# Altium PCB JadePlus_v0.3.1_board.PcbDoc (part 1 of 3)
Units mm, origin at the board's own origin, x right, y up, seen from the top; angles counter-clockwise.
Board outline 26 x 60.7 mm, 4 copper layers (Top/Sig1, Layer 1, Layer 2, Bottom Layer), stack 0.975 mm thick; 120 components, 82 nets, 471 pads, 1359 vias.
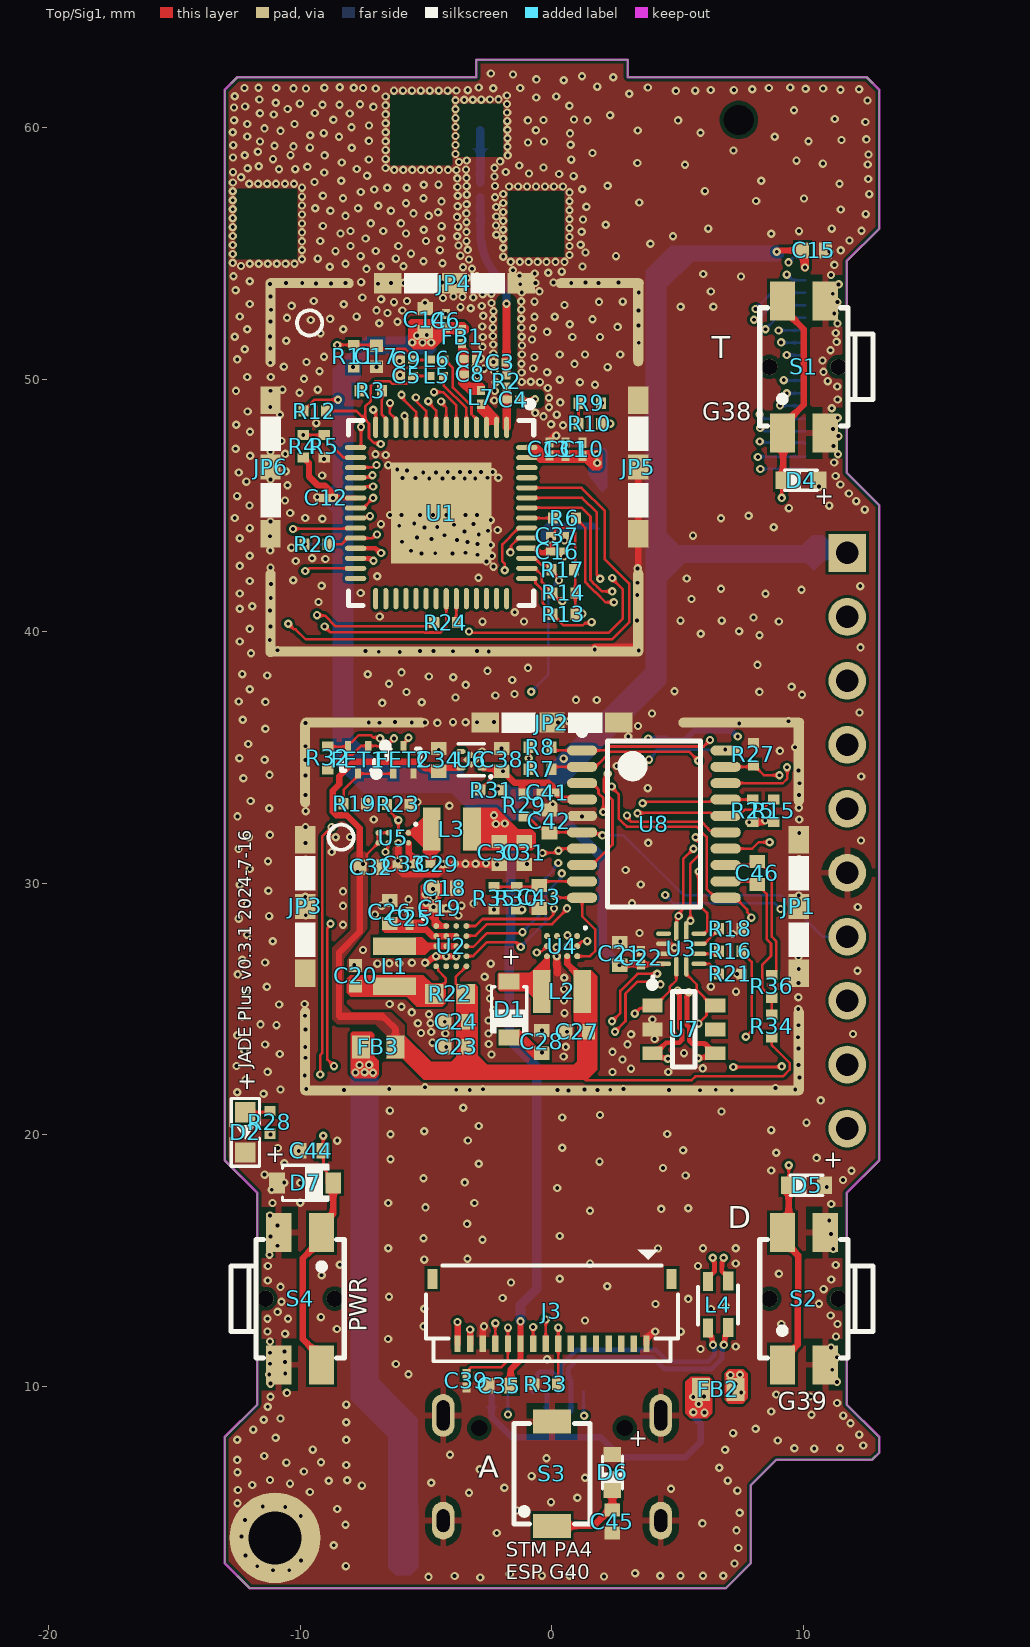
[diagram p0: Top/Sig1 view]
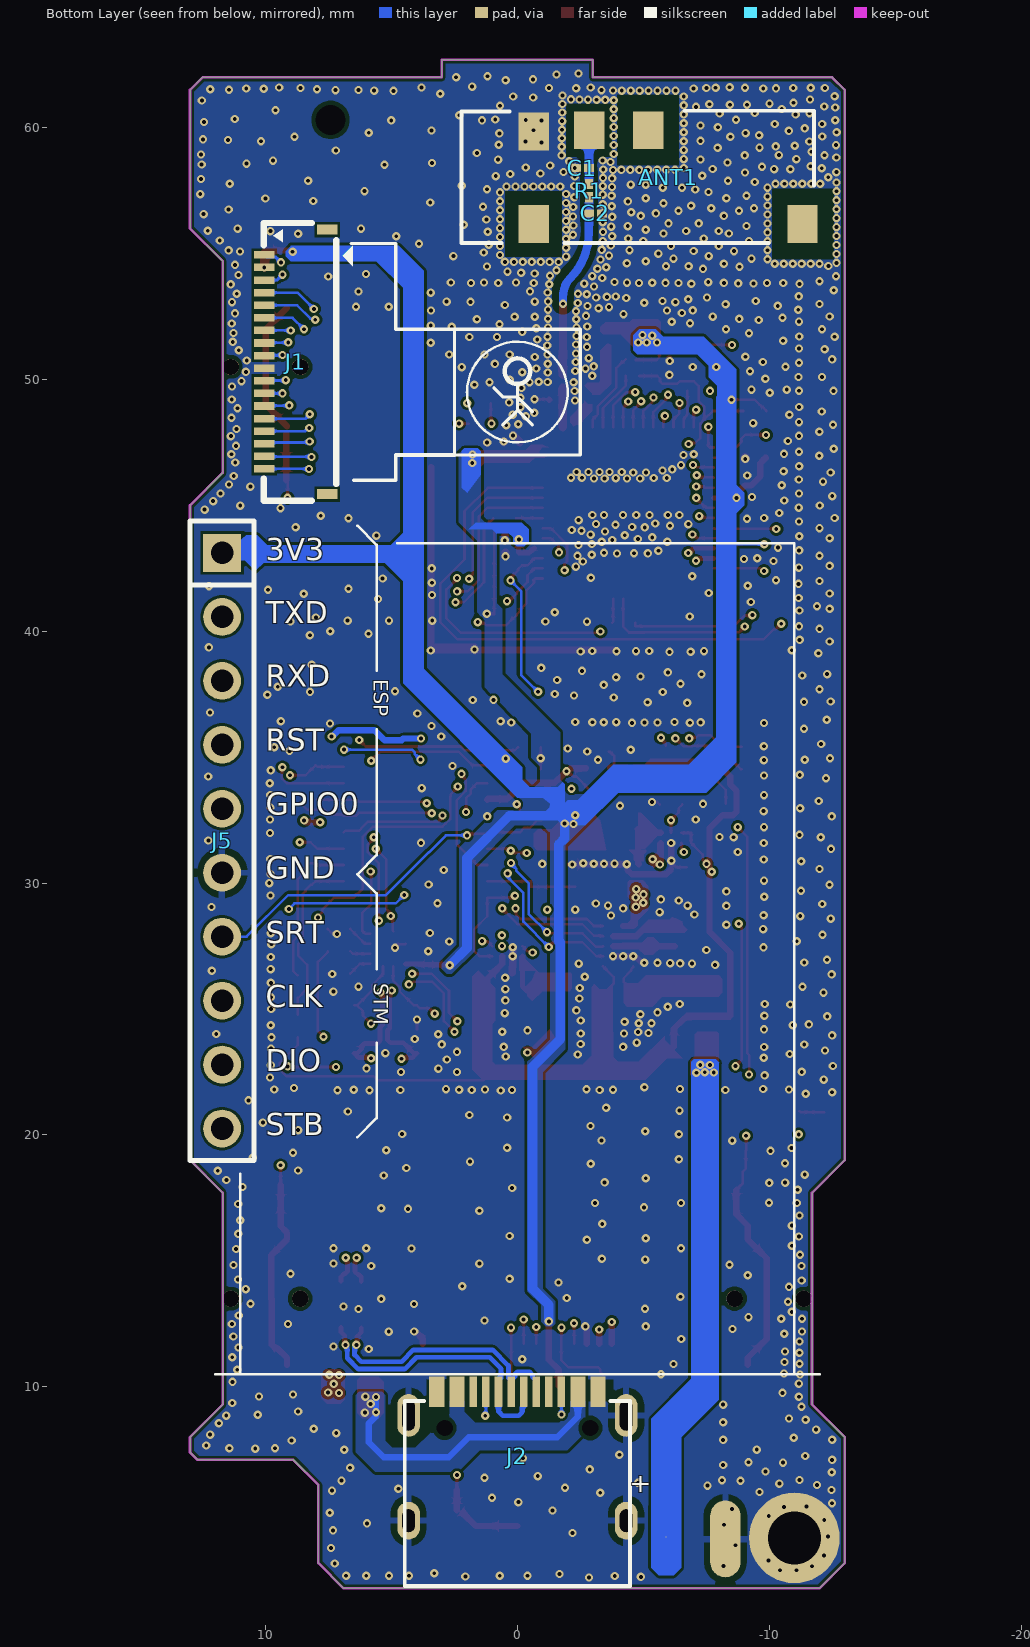
[diagram p1: Bottom Layer view, seen from below]
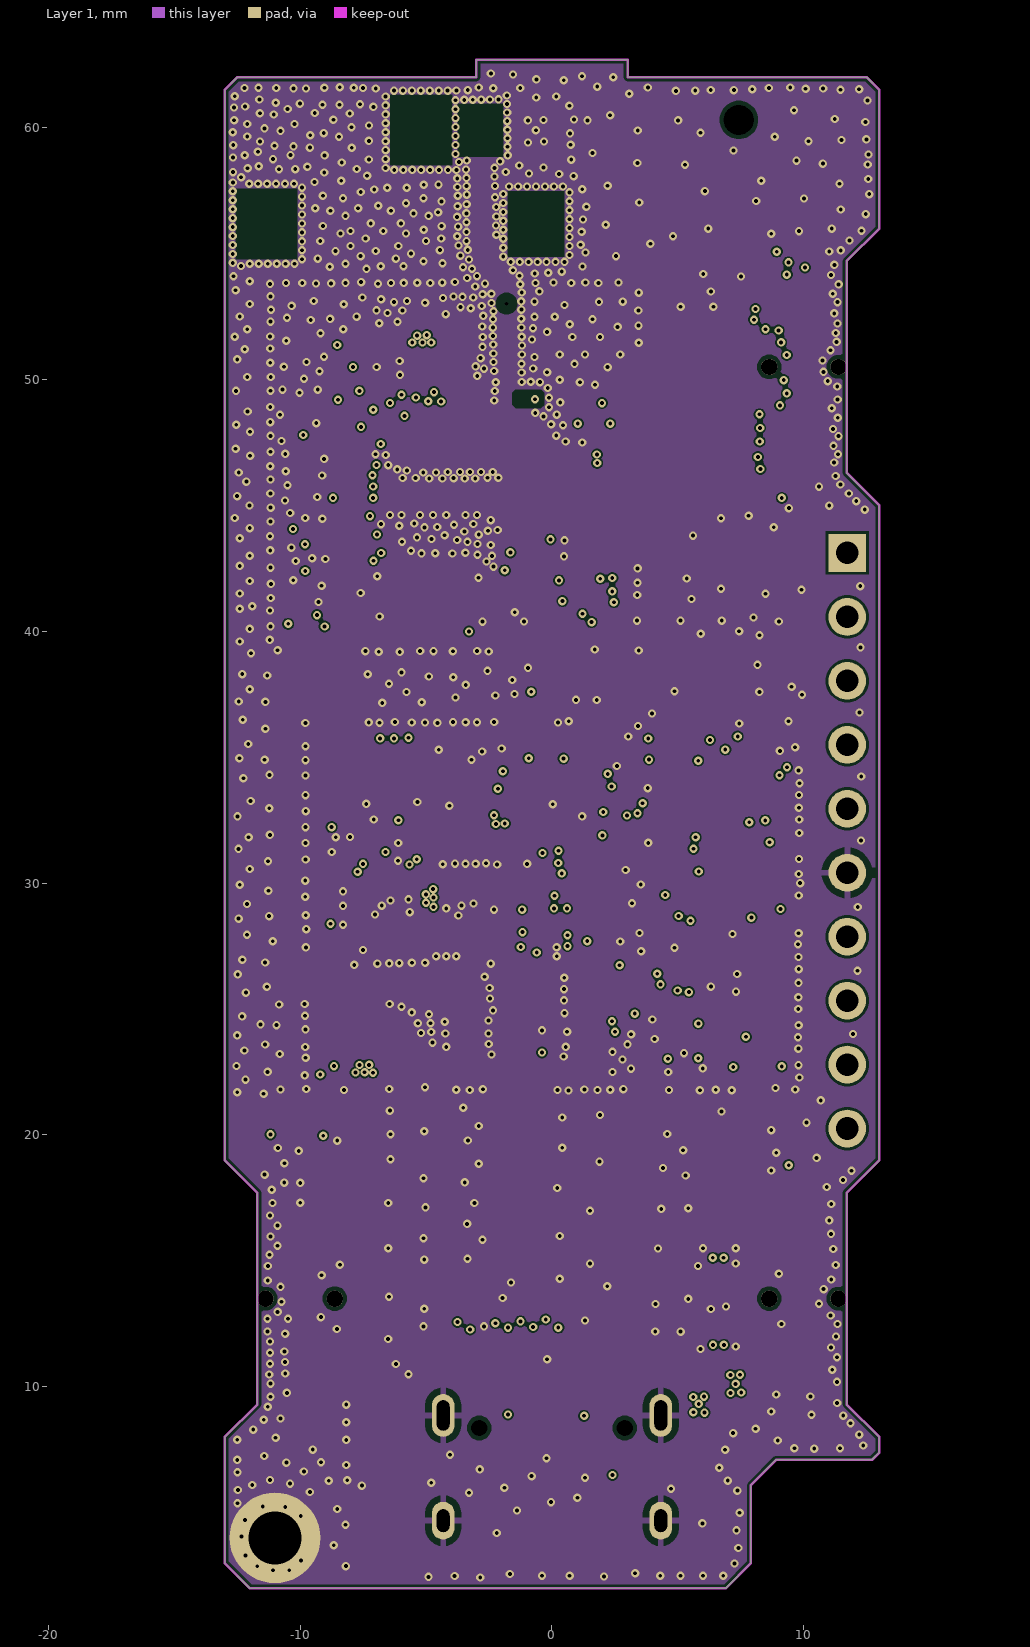
[diagram p2: Layer 1]
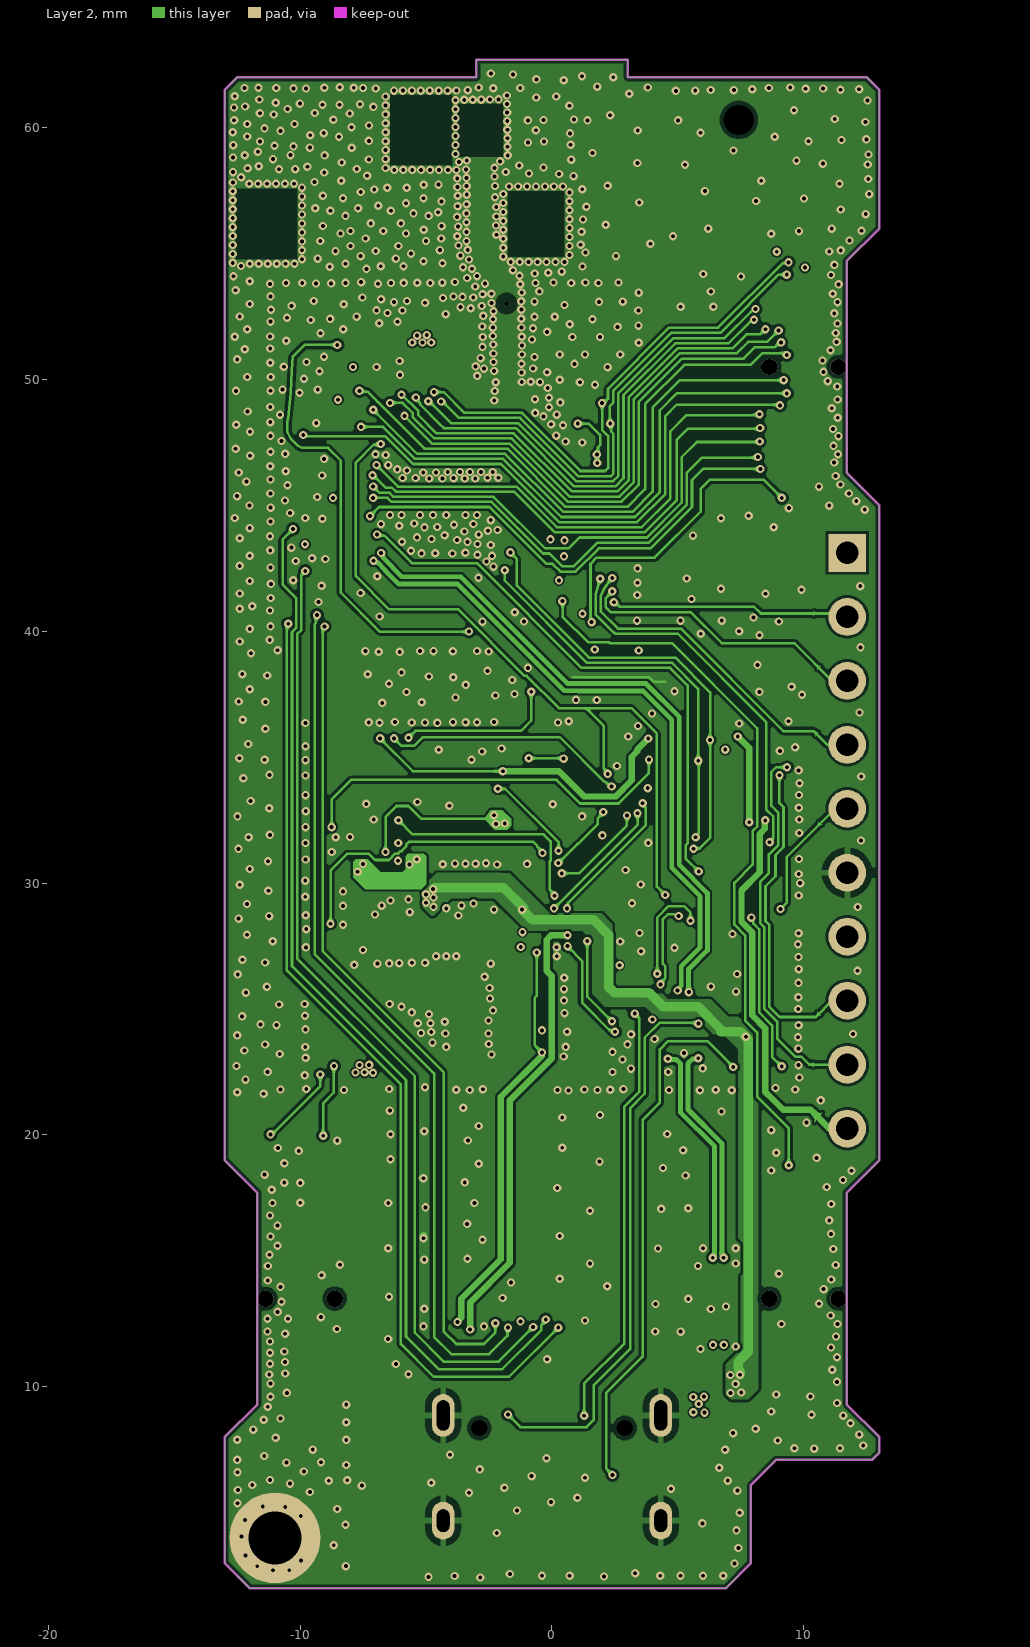
[diagram p3: Layer 2]

## Layer stack, top to bottom
Top Solder: solder mask 0.0127, Solder Resist, Dk 3.8
Top/Sig1: signal copper 0.035
Dielectric 1: prepreg 0.2, PP-006, Dk 4.1
Layer 1: signal copper 0.0175
Dielectric 2: core 0.4696, Core-009, Dk 4.5
Layer 2: signal copper 0.0175
Dielectric 3: prepreg 0.2, PP-006, Dk 4.1
Bottom Layer: signal copper 0.035
Board Layer Stack Bottom Solder: solder mask 0.0127, Solder Resist, Dk 3.8

## Board outline
-13,3 -12,2 6.9,2 7.9,3 7.9,6.1 8.9,7.1 12.7,7.1 13,7.4 13,8 11.7,9.3 11.7,17.7 13,19 13,45 11.7,46.3 11.7,54.7 13,56 13,61.5 12.5,62 3,62 3,62.7 -3,62.7 -3,62 -12.5,62 -13,61.5 -13,19 -11.7,17.7 -11.7,9.3 -13,8

## Design rules (kind name [scope] priority, off if disabled: settings)
Clearance [All] p1: gap=0.102 ignorepadtopadclearanceinfootprint=FALSE except(0.152: Arc-Hole Track-Hole Fill-Hole Poly-Hole Region-Hole)
DiffPairsRouting [All] p1: maxlimit=0.102 minlimit=0.102 mostfreqgap=0.102 substack1={92988ACF-1938-4EE3-B9A0-211830619E81} toplayer_{92988acf-1938-4ee3-b9a0-211830619e81}_minwidth=0.381 toplayer_{92988acf-1938-4ee3-b9a0-211830619e81}_maxwidth=0.381 toplayer_{92988acf-1938-4ee3-b9a0-211830619e81}_prefwidth=0.381 midlayer1_{92988acf-1938-4ee3-b9a0-211830619e81}_minwidth=0.381 midlayer1_{92988acf-1938-4ee3-b9a0-211830619e81}_maxwidth=0.381 midlayer1_{92988acf-1938-4ee3-b9a0-211830619e81}_prefwidth=0.381 midlayer2_{92988acf-1938-4ee3-b9a0-211830619e81}_minwidth=0.381 midlayer2_{92988acf-1938-4ee3-b9a0-211830619e81}_maxwidth=0.381 midlayer2_{92988acf-1938-4ee3-b9a0-211830619e81}_prefwidth=0.381 bottomlayer_{92988acf-1938-4ee3-b9a0-211830619e81}_minwidth=0.381 bottomlayer_{92988acf-1938-4ee3-b9a0-211830619e81}_maxwidth=0.381 bottomlayer_{92988acf-1938-4ee3-b9a0-211830619e81}_prefwidth=0.381 substack2={F6148FA0-9CFD-4FD5-9EC7-82D683A142CA} toplayer_{f6148fa0-9cfd-4fd5-9ec7-82d683a142ca}_minwidth=0.381 toplayer_{f6148fa0-9cfd-4fd5-9ec7-82d683a142ca}_maxwidth=0.381 toplayer_{f6148fa0-9cfd-4fd5-9ec7-82d683a142ca}_prefwidth=0.381 midlayer1_{f6148fa0-9cfd-4fd5-9ec7-82d683a142ca}_minwidth=0.381 midlayer1_{f6148fa0-9cfd-4fd5-9ec7-82d683a142ca}_maxwidth=0.381 midlayer1_{f6148fa0-9cfd-4fd5-9ec7-82d683a142ca}_prefwidth=0.381 midlayer2_{f6148fa0-9cfd-4fd5-9ec7-82d683a142ca}_minwidth=0.381 midlayer2_{f6148fa0-9cfd-4fd5-9ec7-82d683a142ca}_maxwidth=0.381 midlayer2_{f6148fa0-9cfd-4fd5-9ec7-82d683a142ca}_prefwidth=0.381 bottomlayer_{f6148fa0-9cfd-4fd5-9ec7-82d683a142ca}_minwidth=0.381 bottomlayer_{f6148fa0-9cfd-4fd5-9ec7-82d683a142ca}_maxwidth=0.381 bottomlayer_{f6148fa0-9cfd-4fd5-9ec7-82d683a142ca}_prefwidth=0.381 substack3={8B595D62-CE37-4B08-ADE8-BEBB8B08FA51} toplayer_{8b595d62-ce37-4b08-ade8-bebb8b08fa51}_minwidth=0.381 toplayer_{8b595d62-ce37-4b08-ade8-bebb8b08fa51}_maxwidth=0.381 toplayer_{8b595d62-ce37-4b08-ade8-bebb8b08fa51}_prefwidth=0.381 midlayer1_{8b595d62-ce37-4b08-ade8-bebb8b08fa51}_minwidth=0.381 midlayer1_{8b595d62-ce37-4b08-ade8-bebb8b08fa51}_maxwidth=0.381 midlayer1_{8b595d62-ce37-4b08-ade8-bebb8b08fa51}_prefwidth=0.381 midlayer2_{8b595d62-ce37-4b08-ade8-bebb8b08fa51}_minwidth=0.381 midlayer2_{8b595d62-ce37-4b08-ade8-bebb8b08fa51}_maxwidth=0.381 midlayer2_{8b595d62-ce37-4b08-ade8-bebb8b08fa51}_prefwidth=0.381 bottomlayer_{8b595d62-ce37-4b08-ade8-bebb8b08fa51}_minwidth=0.381 bottomlayer_{8b595d62-ce37-4b08-ade8-bebb8b08fa51}_maxwidth=0.381 bottomlayer_{8b595d62-ce37-4b08-ade8-bebb8b08fa51}_prefwidth=0.381 substack4={5A0EA1D2-40C4-4962-BB78-5EF899C24081} toplayer_{5a0ea1d2-40c4-4962-bb78-5ef899c24081}_minwidth=0.381 toplayer_{5a0ea1d2-40c4-4962-bb78-5ef899c24081}_maxwidth=0.381 toplayer_{5a0ea1d2-40c4-4962-bb78-5ef899c24081}_prefwidth=0.381 midlayer1_{5a0ea1d2-40c4-4962-bb78-5ef899c24081}_minwidth=0.381 midlayer1_{5a0ea1d2-40c4-4962-bb78-5ef899c24081}_maxwidth=0.381 midlayer1_{5a0ea1d2-40c4-4962-bb78-5ef899c24081}_prefwidth=0.381 midlayer2_{5a0ea1d2-40c4-4962-bb78-5ef899c24081}_minwidth=0.381 midlayer2_{5a0ea1d2-40c4-4962-bb78-5ef899c24081}_maxwidth=0.381 midlayer2_{5a0ea1d2-40c4-4962-bb78-5ef899c24081}_prefwidth=0.381 bottomlayer_{5a0ea1d2-40c4-4962-bb78-5ef899c24081}_minwidth=0.381 bottomlayer_{5a0ea1d2-40c4-4962-bb78-5ef899c24081}_maxwidth=0.381 bottomlayer_{5a0ea1d2-40c4-4962-bb78-5ef899c24081}_prefwidth=0.381 toplayer_minwidth=0.191 toplayer_maxwidth=0.191 toplayer_prefwidth=0.191 midlayer1_minwidth=0.191 midlayer1_maxwidth=0.191 midlayer1_prefwidth=0.191 midlayer2_minwidth=0.191 midlayer2_maxwidth=0.191 midlayer2_prefwidth=0.191 bottomlayer_minwidth=0.191 bottomlayer_maxwidth=0.191 bottomlayer_prefwidth=0.191 substack5={0CFC8957-5C50-4263-9851-7E474541E8D7} toplayer_{0cfc8957-5c50-4263-9851-7e474541e8d7}_minwidth=0.381 toplayer_{0cfc8957-5c50-4263-9851-7e474541e8d7}_maxwidth=0.381 toplayer_{0cfc8957-5c50-4263-9851-7e474541e8d7}_prefwidth=0.381 midlayer1_{0cfc8957-5c50-4263-9851-7e474541e8d7}_minwidth=0.381 midlayer1_{0cfc8957-5c50-4263-9851-7e474541e8d7}_maxwidth=0.381 midlayer1_{0cfc8957-5c50-4263-9851-7e474541e8d7}_prefwidth=0.381 midlayer2_{0cfc8957-5c50-4263-9851-7e474541e8d7}_minwidth=0.381 midlayer2_{0cfc8957-5c50-4263-9851-7e474541e8d7}_maxwidth=0.381 midlayer2_{0cfc8957-5c50-4263-9851-7e474541e8d7}_prefwidth=0.381 bottomlayer_{0cfc8957-5c50-4263-9851-7e474541e8d7}_minwidth=0.381 bottomlayer_{0cfc8957-5c50-4263-9851-7e474541e8d7}_maxwidth=0.381 bottomlayer_{0cfc8957-5c50-4263-9851-7e474541e8d7}_prefwidth=0.381 substack6={891EAD28-3441-4CE9-9ED8-1EA925882EB5} toplayer_{891ead28-3441-4ce9-9ed8-1ea925882eb5}_minwidth=0.381 toplayer_{891ead28-3441-4ce9-9ed8-1ea925882eb5}_maxwidth=0.381 toplayer_{891ead28-3441-4ce9-9ed8-1ea925882eb5}_prefwidth=0.381 midlayer1_{891ead28-3441-4ce9-9ed8-1ea925882eb5}_minwidth=0.381 midlayer1_{891ead28-3441-4ce9-9ed8-1ea925882eb5}_maxwidth=0.381 midlayer1_{891ead28-3441-4ce9-9ed8-1ea925882eb5}_prefwidth=0.381 midlayer2_{891ead28-3441-4ce9-9ed8-1ea925882eb5}_minwidth=0.381 midlayer2_{891ead28-3441-4ce9-9ed8-1ea925882eb5}_maxwidth=0.381 midlayer2_{891ead28-3441-4ce9-9ed8-1ea925882eb5}_prefwidth=0.381 bottomlayer_{891ead28-3441-4ce9-9ed8-1ea925882eb5}_minwidth=0.381 bottomlayer_{891ead28-3441-4ce9-9ed8-1ea925882eb5}_maxwidth=0.381 bottomlayer_{891ead28-3441-4ce9-9ed8-1ea925882eb5}_prefwidth=0.381 substack7={7F79224F-7092-4D3B-9988-48B015572600} toplayer_{7f79224f-7092-4d3b-9988-48b015572600}_minwidth=0.381 toplayer_{7f79224f-7092-4d3b-9988-48b015572600}_maxwidth=0.381 toplayer_{7f79224f-7092-4d3b-9988-48b015572600}_prefwidth=0.381 midlayer1_{7f79224f-7092-4d3b-9988-48b015572600}_minwidth=0.381 midlayer1_{7f79224f-7092-4d3b-9988-48b015572600}_maxwidth=0.381 midlayer1_{7f79224f-7092-4d3b-9988-48b015572600}_prefwidth=0.381 midlayer2_{7f79224f-7092-4d3b-9988-48b015572600}_minwidth=0.381 midlayer2_{7f79224f-7092-4d3b-9988-48b015572600}_maxwidth=0.381 midlayer2_{7f79224f-7092-4d3b-9988-48b015572600}_prefwidth=0.381 bottomlayer_{7f79224f-7092-4d3b-9988-48b015572600}_minwidth=0.381 bottomlayer_{7f79224f-7092-4d3b-9988-48b015572600}_maxwidth=0.381 bottomlayer_{7f79224f-7092-4d3b-9988-48b015572600}_prefwidth=0.381 substack8={ED050045-44D2-452F-869E-0CA1F9CDEF29} toplayer_{ed050045-44d2-452f-869e-0ca1f9cdef29}_minwidth=0.381 toplayer_{ed050045-44d2-452f-869e-0ca1f9cdef29}_maxwidth=0.381 toplayer_{ed050045-44d2-452f-869e-0ca1f9cdef29}_prefwidth=0.381 midlayer1_{ed050045-44d2-452f-869e-0ca1f9cdef29}_minwidth=0.381 midlayer1_{ed050045-44d2-452f-869e-0ca1f9cdef29}_maxwidth=0.381 midlayer1_{ed050045-44d2-452f-869e-0ca1f9cdef29}_prefwidth=0.381 midlayer2_{ed050045-44d2-452f-869e-0ca1f9cdef29}_minwidth=0.381 midlayer2_{ed050045-44d2-452f-869e-0ca1f9cdef29}_maxwidth=0.381 midlayer2_{ed050045-44d2-452f-869e-0ca1f9cdef29}_prefwidth=0.381 bottomlayer_{ed050045-44d2-452f-869e-0ca1f9cdef29}_minwidth=0.381 bottomlayer_{ed050045-44d2-452f-869e-0ca1f9cdef29}_maxwidth=0.381 bottomlayer_{ed050045-44d2-452f-869e-0ca1f9cdef29}_prefwidth=0.381 substack9={60559F0D-4A15-4E28-B2D1-7F084EBE3949} toplayer_{60559f0d-4a15-4e28-b2d1-7f084ebe3949}_minwidth=0.381 toplayer_{60559f0d-4a15-4e28-b2d1-7f084ebe3949}_maxwidth=0.381 toplayer_{60559f0d-4a15-4e28-b2d1-7f084ebe3949}_prefwidth=0.381 midlayer1_{60559f0d-4a15-4e28-b2d1-7f084ebe3949}_minwidth=0.381 midlayer1_{60559f0d-4a15-4e28-b2d1-7f084ebe3949}_maxwidth=0.381 midlayer1_{60559f0d-4a15-4e28-b2d1-7f084ebe3949}_prefwidth=0.381 midlayer2_{60559f0d-4a15-4e28-b2d1-7f084ebe3949}_minwidth=0.381 midlayer2_{60559f0d-4a15-4e28-b2d1-7f084ebe3949}_maxwidth=0.381 midlayer2_{60559f0d-4a15-4e28-b2d1-7f084ebe3949}_prefwidth=0.381 bottomlayer_{60559f0d-4a15-4e28-b2d1-7f084ebe3949}_minwidth=0.381 bottomlayer_{60559f0d-4a15-4e28-b2d1-7f084ebe3949}_maxwidth=0.381 bottomlayer_{60559f0d-4a15-4e28-b2d1-7f084ebe3949}_prefwidth=0.381 maxuncoupledlength=12.7
PlaneConnect [All] p1: planeconnectstyle=Direct reliefexpansion=0.508 reliefentries=4 reliefconductorwidth=0.254 reliefairgap=0.254
PolygonConnect [All] p1: connectstyle=Direct reliefconductorwidth=0.254 reliefentries=4 polygonreliefangle="90 Angle" airgapwidth=0.254
RoomDefinition A4-CONN [InComponentClass('A4-CONN')] p1: confinementstyle=ConfineIn formatcopy=TRUE lockcomponents=FALSE outline -101.438,-52.746 -50.638,-52.746 -50.638,-27.346 -101.438,-27.346
RoomDefinition A3-PMS [InComponentClass('A3-PMS')] p2: confinementstyle=ConfineIn formatcopy=TRUE lockcomponents=FALSE outline -101.438,-52.746 -50.638,-52.746 -50.638,-27.346 -101.438,-27.346
RoomDefinition A2-ESP32S3 [InComponentClass('A2-ESP32S3')] p3: confinementstyle=ConfineIn formatcopy=TRUE lockcomponents=FALSE outline -101.438,-52.746 -50.638,-52.746 -50.638,-27.346 -101.438,-27.346
RoutingVias [All] p1: holewidth=0.711 width=1.27 viastyle="Through Hole" minholewidth=0.711 minwidth=1.27 maxholewidth=0.711 maxwidth=1.27 useviatemplates=TRUE viatemplateguid#1={183ADF18-3FBE-4BD5-A7C9-C92B7715F963} viatemplatename#1=v33h15m0mx0
SolderMaskExpansion [All] p1: expansion=0.102 istentingtop=FALSE
Width [All] p1: maxlimit=0.381 minlimit=0.102 preferedwidth=0.254 substack1={92988ACF-1938-4EE3-B9A0-211830619E81} substack2={F6148FA0-9CFD-4FD5-9EC7-82D683A142CA} substack3={8B595D62-CE37-4B08-ADE8-BEBB8B08FA51} substack4={5A0EA1D2-40C4-4962-BB78-5EF899C24081} substack5={0CFC8957-5C50-4263-9851-7E474541E8D7} substack6={891EAD28-3441-4CE9-9ED8-1EA925882EB5} substack7={7F79224F-7092-4D3B-9988-48B015572600} substack8={ED050045-44D2-452F-869E-0CA1F9CDEF29} substack9={60559F0D-4A15-4E28-B2D1-7F084EBE3949} minimp=50.000000 maximp=50.000000 favimp=50.000000
28 further rules are at their usual default settings.

## Classes and differential pairs
component class A4-CONN: C35 C39 D4 D5 D6 D7 FB2 FB3 FET1 FET2 J1 J2 J3 J5 L4 R17 R19 S1 S2 S3 S4 U7
component class A3-PMS: C18 C19 C20 C21 C22 C23 C24 C25 C26 C27 C28 C29 C30 C31 C32 C33 C34 C38 C41 C42 C43 C44 C45 C46 D1 D2 L1 L2 L3 R15 R16 R18 R20 R21 R22 R23 R25 R27 R28 R29 R30 R31 R32 R34 R35 R36 U2 U3 U4 U5 U6 U8
component class A2-ESP32S3: ANT1 C1 C2 C3 C4 C5 C6 C7 C8 C9 C10 C11 C12 C13 C14 C15 C16 C17 C37 FB1 JP1 JP2 JP3 JP4 JP5 JP6 L5 L6 L7 R1 R2 R3 R4 R5 R6 R7 R8 R9 R10 R11 R12 R13 R14 R24 R33 U1
differential pair USB_DE: +USB_DE_P -USB_DE_N
differential pair USB_D: +USB_D_P -USB_D_N

## Components (designator, comment, footprint, x,y, rotation, side; value= is the part's Value field where it differs from the comment)
ANT1 "ESP-H0920-PIFA" ESP-H0920-PIFA -2.85,59.9 r180 bottom locked
C1 "TBD" C0201-HD#1 -2.585,58.4 r180 bottom
C2 "TBD" C0201-HD#1 -3.1,56.6 r0 bottom
C3 "TBD" C0201-HD#1 -2.06,50.675 r0 top
C4 "TBD" C0201-HD#1 -1.53,49.2 r180 top
C5 "NC" C0201-HD#1 -5.775,50.141 r180 top
C6 "1uF/10V" C0201-HD#1 -4.217,52.338 r90 top
C7 "1uF/10V" C0201-HD#1 -3.246,50.811 r180 top
C8 "100nF/25V" C0201-HD#1 -3.24,50.2 r0 top
C9 "NC" C0201-HD#1 -5.777,50.794 r180 top
C10 "1uF/10V" C0201-HD#1 1.208,47.23 r90 top
C11 "100nF/25V" C0201-HD#1 0.541,47.235 r90 top
C12 "100nF/25V" C0201-HD#1 -8.96,45.3 r180 top
C13 "100nF/25V" C0201-HD#1 -0.1,47.24 r90 top
C14 "10uF/10V" C0402-L-HD#1 -5.038,52.368 r270 top
C15 "10uF/10V" C0402-L-HD#1 10.4,55.125 r180 top
C16 "100nF/25V" C0201-HD#1 0.213,43.168 r0 top
C17 "1uF/16V" C0402-HD -6.975,50.925 r90 top
C18 "1uF/50V" C0402-L-HD#1 -4.25,29.8 r180 top
C19 "100nF/25V" C0201-HD#1 -4.45,29 r180 top
C20 "100nF/25V" C0402-HD -7.8,26.315 r90 top
C21 "4.7uF/10V" C0402-L-HD#1 2.685,27.196 r270 top
C22 "100nF/25V" C0201-HD#1 3.535,27.036 r270 top
C23 "10uF/10V" C0402-L-HD#1 -3.805,23.5 r0 top
C24 "10uF/10V" C0402-L-HD#1 -3.805,24.5 r0 top
C25 "100nF/25V" C0201-HD#1 -5.65,28.6 r270 top
C26 "4.7uF/16V" C0402-L-HD#1 -6.45,28.855 r270 top
C27 "10uF/10V" C0402-L-HD#1 1,24.1 r0 top
C28 "1uF/50V" C0402-L-HD#1 -0.4,23.7 r270 top
C29 "1nF/50V" C0201-HD#1 -4.561,30.753 r180 top
C30 "10uF/10V" C0402-L-HD#1 -2.1,31.2 r90 top
C31 "10uF/10V" C0402-L-HD#1 -1.1,31.2 r90 top
C32 "10uF/10V" C0402-L-HD#2 -7.175,30.625 r180 top
C33 "100nF/25V" C0201-HD#2 -5.876,30.745 r0 top
C34 "1uF/50V" C0402-L-HD#1 -4.5,34.9 r270 top
C35 "1uF/50V" C0402-L-HD#1 -2.095,10.05 r0 top
C37 "1uF/10V" C0201-HD#1 0.215,43.795 r0 top
C38 "4.7uF/16V" C0402-L-HD#1 -2,34.9 r270 top
C39 "NC" C0201-HD#1 -3.4,10.24 r270 top
C41 "100nF/25V" C0201-HD#1 -0.16,33.6 r0 top
C42 "1uF/50V" C0402-L-HD#1 -0.1,32.455 r270 top
C43 "1uF/50V" C0402-L-HD#1 -0.5,29.445 r90 top
C44 "1uF/50V" C0402-L-HD#1 -9.555,19.375 r0 top
C45 "1uF/50V" C0402-L-HD#1 2.4,4.65 r90 top
C46 "1uF/50V" C0402-L-HD#1 8.15,30.4 r270 top
D1 "B0530WS SE" SMT_DIODE_SOD_323 -1.7,24.985 r270 top
D2 "GREEN" SMT_LED_0603 -12.179,20.105 r270 top
D4 "3.3V/TVS/SOD523" SMT_DIODE_SOD_523 9.89,46 r180 top
D5 "3.3V/TVS/SOD523" SMT_DIODE_SOD_523 10.11,18 r180 top
D6 "3.3V/TVS/SOD523" SMT_DIODE_SOD_523 2.4,6.6 r270 top
D7 "5V/TVS/SOD323" SMT_DIODE_SOD_323 -9.8,18.1 r0 top
FB1 "BLF03VK600" L0201-HD -3.566,51.703 r90 top
FB2 "YI160808U601-2R0T" L0603-HD 6.6,9.9 r180 top
FB3 "YI160808U601-2R0T" L0603-HD -6.9,23.5 r180 top
FET1 "CJ3139K" SOT-723-HD -7.7,34.9 r270 top
FET2 "2N7002" SOT-723-HD -5.9,34.9 r90 top
J1 "FH34SRJ-18S-0.5SH" FH34SRJ-18S-0.5SH 8.5,50.7 r180 bottom locked
J2 "TYPEC" USB_TYPEC_16P_HD 0,8.364 r0 bottom locked
J3 "FH34SRJ-16S-0.5SH" FPC_0.5MM_16P_H1.0_DNUP_FH34SRJ-16S-0.5SH 0,13 r180 top locked
J5 "THT_Male_P_1x10" THT_Male_P_1x10-2.54mm 11.725,43.115 r180 bottom
JP1 "ICSRC6508SFR" SMD_3P-L6.7-W0.9-R3-P2.65-ICSRC6508SFR 9.8,29.075 r90 top
JP2 "ICSRC6508SFR" SMD_3P-L6.7-W0.9-R3-P2.65-ICSRC6508SFR 0,36.375 r0 top
JP3 "ICSRC6508SFR" SMD_3P-L6.7-W0.9-R3-P2.65-ICSRC6508SFR -9.8,29.075 r270 top
JP4 "ICSRC6508SFR" SMD_3P-L6.7-W0.9-R3-P2.65-ICSRC6508SFR -3.875,53.825 r0 top
JP5 "ICSRC6508SFR" SMD_3P-L6.7-W0.9-R3-P2.65-ICSRC6508SFR 3.425,46.525 r270 top
JP6 "ICSRC6508SFR" SMD_3P-L6.7-W0.9-R3-P2.65-ICSRC6508SFR -11.175,46.525 r270 top
L1 "MWTC201610S1R0" MWTC201610-HD -6.25,26.7 r270 top
L2 "WPN201610H100MT" MWTC201610-HD 0.4,25.7 r180 top
L3 "MWTC201608S2R2" MWTC201610-HD -3.975,32.146 r180 top
L4 "ACM2012-202-2P-T002" ACM2012 6.6,13.268 r90 top
L5 "2nH" L0201-HD -4.577,50.142 r0 top
L6 "2nH" L0201-HD -4.57,50.8 r180 top
L7 "2nH" L0201-HD -2.817,49.294 r90 top
R1 "0R/TBD" C0201-HD#1 -2.85,57.5 r270 bottom
R2 "0R/TBD" C0201-HD#1 -1.8,49.935 r270 top
R3 "51R/1%" R0402-HD -7.2,49.55 r0 top
R4 "220R/1%" R0402-HD -9.875,47.35 r90 top
R5 "220R/1%" R0402-HD -9.05,47.35 r270 top
R6 "499R/1%" R0402-HD 0.5,44.5 r180 top
R7 "2.2K/1%" R0402-HD -0.475,34.525 r180 top
R8 "2.2K/1%" R0402-HD -0.475,35.4 r180 top
R9 "2.2K/1%" R0402-HD 1.502,49.064 r180 top
R10 "2.2K/1%" R0402-HD 1.502,48.25 r180 top
R11 "10K/1%" R0402-HD -7.875,50.925 r90 top
R12 "10K/1%" R0402-HD -9.425,48.75 r180 top
R13 "10K/1%" R0402-HD 0.475,40.675 r0 top
R14 "10K/1%" R0402-HD 0.475,41.525 r0 top
R15 "2.2K/1%" R0402-HD 8.8,32.875 r270 top
R16 "866K/1%" R0402-HD 7.075,27.296 r180 top
R17 "10K/1%" R0402-HD 0.425,42.45 r180 top
R18 "10K/1%" R0402-HD 7.075,28.196 r0 top
R19 "100K/1%" R0402-HD -7.825,33.15 r0 top
R20 "10K/1%" R0402-HD -9.372,43.457 r180 top
R21 "NC" R0402-HD 7.075,26.396 r180 top
R22 "0.1R/1%" R0603-HD -4.05,25.6 r180 top
R23 "100K/1%" R0402-HD -6.1,33.125 r180 top
R24 "22R/1%" R0402-HD -4.225,40.35 r0 top
R25 "2.2K/1%" R0402-HD 7.975,32.875 r270 top
R27 "10K/1%" R0402-HD 8,35.125 r270 top
R28 "470R/1%" R0402-HD -11.2,20.5 r270 top
R29 "10K/1%" R0402-HD -1.1,33.1 r270 top
R30 "2.7K/1%" R0402-HD -1.4,29.4 r90 top
R31 "10K/1%" R0402-HD -2.4,33.7 r0 top
R32 "10K/1%" R0402-HD -8.9,34.975 r270 top
R33 "10K/1%" R0402-HD -0.25,10.1 r0 top
R34 "2.7K/1%" R0402-HD 8.722,24.325 r90 top
R35 "3.3K/1%" R0402-HD -2.3,29.4 r270 top
R36 "3.3K/1%" R0402-HD 8.722,25.9 r90 top
S1 "SMT_SW_TACTILE" SMT_SW_TS_1186D_C_A 10,50.5 r90 top locked
S2 "SMT_SW_TACTILE" SMT_SW_TS_1186D_C_A 10,13.5 r90 top locked
S3 "SMT_SW_TACTILE" SMT_SW_PTS_820 0,6.55 r90 top locked
S4 "SMT_SW_TACTILE" SMT_SW_TS_1186D_C_A -10,13.5 r270 top locked
U1 "ESP32-S3-PICO-1-N8R8" QFN40P700X700X90_HS-57N -4.4,44.7 r270 top locked
U2 "AW32257FCR" BGA20C40P4X5_200X200X60 -4,27.5 r0 top
U3 "SGM7220XUQT12G/TR" QFN40P160X160X60-12L 5.135,27.396 r180 top
U4 "AW99703CSR" BGA12C40P3X4_124X164X64 0.4,27.5 r270 top
U5 "JW5712" BGA8C40P2X4_86X156X60 -6.3,31.8 r270 top
U6 "SSP7615-33DFR" X2SON4 -3.2,34.9 r180 top
U7 "SRV05-4" SOT-236-HD 5.235,24.196 r0 top
U8 "STM32G030F6P6" TSOP-20-HD 4.046,32.346 r0 top

## Footprints (in the part's own frame and the unit in brackets; to place one, negate y for a bottom-side part, rotate by r counter-clockwise, add the part's x,y. Pads: shape width x height; smd on the part's side, far side on the other; paste and mask are expansions set on the pad)
ACM2012 [mm]
  rect 0.75x0.4 smd: 1(-0.932,0.4) 2(-0.918,-0.4) 3(0.932,-0.4) 4(0.918,0.4)
  silkscreen extent -0.8,-0.79 0.75,0.8, body extent -1,-0.6 1,0.6, height 1.24
BGA8C40P2X4_86X156X60 [mm] "BGA, 8-Leads, Body 0.87x1.57mmx0.60mm, Pitch 0.40mm"
  round 0.22 smd mask+0.051: A1(-0.2,0.6) A2(0.2,0.6) B1(-0.2,0.2) B2(0.2,0.2) C1(-0.2,-0.2) C2(0.2,-0.2) D1(-0.2,-0.6) D2(0.2,-0.6)
  silkscreen extent -0.59,0.84 -0.49,0.94, body extent -0.44,-0.78 0.44,0.78, height 0.6
BGA12C40P3X4_124X164X64 [mm] "BGA, 12-Leads, Body 1.24x1.64mmx0.64mm, Pitch 0.40mm"
  round 0.24 smd mask+0.051: A1(-0.4,0.6) A2(0,0.6) A3(0.4,0.6) B1(-0.4,0.2) B2(0,0.2) B3(0.4,0.2) C1(-0.4,-0.2) C2(0,-0.2) C3(0.4,-0.2) D1(-0.4,-0.6) D2(0,-0.6) D3(0.4,-0.6)
  silkscreen extent -0.77,0.88 -0.68,0.97, body extent -0.62,-0.82 0.62,0.82, height 0.64
BGA20C40P4X5_200X200X60 [mm] "BGA, 20-Leads, Body 2.00x2.00mmx0.60mm, Pitch 0.40mm"
  round 0.23 smd mask+0.051: A1(-0.6,0.8) A2(-0.2,0.8) A3(0.2,0.8) A4(0.6,0.8) B1(-0.6,0.4) B2(-0.2,0.4) B3(0.2,0.4) B4(0.6,0.4) C1(-0.6,0) C2(-0.2,0) C3(0.2,0) C4(0.6,0) D1(-0.6,-0.4) D2(-0.2,-0.4) D3(0.2,-0.4) D4(0.6,-0.4) E1(-0.6,-0.8) E2(-0.2,-0.8) E3(0.2,-0.8) E4(0.6,-0.8)
  silkscreen extent -1.15,1.06 -1.05,1.15, body extent -1,-1 1,1, height 0.6
C0201-HD#1 [mm] "Chip Capacitor, 2-Leads, Body 0.60x0.30mm, IPC High Density"
  rect 0.4x0.32 smd: 1(-0.26,0) 2(0.26,0)
  body extent -0.32,-0.17 0.32,0.17, height 0.33
C0201-HD#2 [mm] "Chip Capacitor, 2-Leads, Body 0.60x0.30mm, IPC High Density"
  rect 0.4x0.32 smd mask+0.051: 1(-0.26,0) 2(0.26,0)
  body extent -0.32,-0.17 0.32,0.17, height 0.33
C0402-HD [mm] "Chip Capacitor, 2-Leads, Body 1.00x0.50mm, IPC High Density"
  rect 0.5x0.52 smd: 1(-0.415,0) 2(0.415,0)
  body extent -0.53,-0.28 0.53,0.28, height 0.55
C0402-L-HD#1 [mm] "Chip Capacitor, 2-Leads, Body 1.00x0.50mm, IPC High Density"
  rect 0.52x0.62 smd: 1(-0.455,0) 2(0.455,0)
  body extent -0.6,-0.35 0.6,0.35, height 0.7
C0402-L-HD#2 [mm] "Chip Capacitor, 2-Leads, Body 1.00x0.50mm, IPC High Density"
  rect 0.52x0.62 smd mask+0.051: 1(-0.455,0) 2(0.455,0)
  body extent -0.6,-0.35 0.6,0.35, height 0.7
ESP-H0920-PIFA [mm]
  rect 1.2x1.5 smd: 1(0,0) 2(-2.2,-0.05) 3(2.35,0) 4(-2.2,-3.725) 5(8.475,-3.725)
  Multi-Layer pour cut-out: -0.907,1.053 -0.907,-1.047 0.893,-1.047 0.893,1.053
  Multi-Layer pour cut-out: 1.118,1.403 1.118,-1.397 3.568,-1.397 3.568,1.403
  Multi-Layer pour cut-out: 7.263,-2.327 7.263,-5.127 9.713,-5.127 9.713,-2.327
  Multi-Layer pour cut-out: -3.337,-2.427 -3.337,-5.027 -1.087,-5.027 -1.087,-2.427
  silkscreen extent -5.07,-4.47 8.93,0.77, body extent -4.95,-4.37 8.8,0.63, height 3.8
FH34SRJ-18S-0.5SH [mm]
  rect 0.8x0.3 smd paste+0 mask+0.05: 1(-1.55,4.25) 2(-1.55,3.75) 3(-1.55,3.25) 4(-1.55,2.75) 5(-1.55,2.25) 6(-1.55,1.75) 7(-1.55,1.25) 8(-1.55,0.75) 9(-1.55,0.25) 10(-1.55,-0.25) 11(-1.55,-0.75) 12(-1.55,-1.25) 13(-1.55,-1.75) 14(-1.55,-2.25) 15(-1.55,-2.75) 16(-1.55,-3.25) 17(-1.55,-3.75) 18(-1.55,-4.25)
  rect 0.8x0.4 smd paste+0 mask+0.05: 19(0.95,-5.25) 20(0.95,5.25)
  silkscreen extent -1.57,-5.52 1.3,5.52, body extent -2.52,-5.52 1.28,5.48, height 1
FPC_0.5MM_16P_H1.0_DNUP_FH34SRJ-16S-0.5SH [mm]
  rect 0.4x0.8 smd mask+0.051: 0(-4.75,-1.288) 0(4.75,-1.288)
  rect 0.25x0.65 smd mask+0.051: 1(-3.75,1.288) 2(-3.25,1.288) 3(-2.75,1.288) 4(-2.25,1.288) 5(-1.75,1.288) 6(-1.25,1.288) 7(-0.75,1.288) 8(-0.25,1.288) 9(0.25,1.288) 10(0.75,1.288) 11(1.25,1.288) 12(1.75,1.288) 13(2.25,1.288) 14(2.75,1.288) 15(3.25,1.288) 16(3.75,1.288)
  silkscreen extent -5,-1.81 5,1.99, body extent -5,-1.8 5,2, height 1
L0201-HD [mm] "Chip Inductor, 2-Leads, Body 0.60x0.30mm, IPC High Density"
  rect 0.37x0.32 smd: 1(-0.27,0) 2(0.27,0)
  body extent -0.32,-0.17 0.32,0.17, height 0.33
L0603-HD [mm] "Chip Inductor, 2-Leads, Body 1.60x0.80mm, IPC High Density"
  rect 0.73x0.92 smd: 1(-0.685,0) 2(0.685,0)
  body extent -0.9,-0.5 0.9,0.5, height 1
MWTC201610-HD [mm] "Mini Molded Chip Power Inductors 锟?MWTC Series, 2-Leads, Body 1.60x2.00mm, Pitch 1.60mm, IPC High Density"
  rect 0.7x1.7 smd: 1(-0.8,0) 2(0.8,0)
  body extent -1.2,-0.9 1.2,0.9, height 1
QFN40P160X160X60-12L [mm] "QFN, 12-Leads, Body 1.60x1.60mm, Pitch 0.40mm, IPC High Density"
  oval 0.18x0.8 smd mask+0.051: 1(0.2,0.7) 2(-0.2,0.7) 7(-0.2,-0.7) 8(0.2,-0.7)
  oval 0.6x0.18 smd mask+0.051: 3(-0.7,0.6) 4(-0.7,0.2) 5(-0.7,-0.2) 6(-0.7,-0.6) 9(0.7,-0.6) 10(0.7,-0.2) 11(0.7,0.2) 12(0.7,0.6)
  silkscreen extent 1.07,1.08 1.17,1.17, body extent -0.83,-0.83 0.83,0.83, height 0.6
QFN40P700X700X90_HS-57N [mm] "QFN, 56-Leads, Body 7.00x7.00mm, Pitch 0.40mm, Thermal Pad 4.00x4.00mm, IPC Medium Density"
  oval 0.85x0.2 smd: 1(-3.4,2.6) 2(-3.4,2.2) 3(-3.4,1.8) 4(-3.4,1.4) 5(-3.4,1) 6(-3.4,0.6) 7(-3.4,0.2) 8(-3.4,-0.2) 9(-3.4,-0.6) 10(-3.4,-1) 11(-3.4,-1.4) 12(-3.4,-1.8) 13(-3.4,-2.2) 14(-3.4,-2.6) 29(3.4,-2.6) 30(3.4,-2.2) 31(3.4,-1.8) 32(3.4,-1.4) 33(3.4,-1) 34(3.4,-0.6) 35(3.4,-0.2) 36(3.4,0.2) 37(3.4,0.6) 38(3.4,1) 39(3.4,1.4) 40(3.4,1.8) 41(3.4,2.2) 42(3.4,2.6)
  oval 0.2x0.85 smd: 15(-2.6,-3.4) 16(-2.2,-3.4) 17(-1.8,-3.4) 18(-1.4,-3.4) 19(-1,-3.4) 20(-0.6,-3.4) 21(-0.2,-3.4) 22(0.2,-3.4) 23(0.6,-3.4) 24(1,-3.4) 25(1.4,-3.4) 26(1.8,-3.4) 27(2.2,-3.4) 28(2.6,-3.4) 43(2.6,3.4) 44(2.2,3.4) 45(1.8,3.4) 46(1.4,3.4) 47(1,3.4) 48(0.6,3.4) 49(0.2,3.4) 50(-0.2,3.4) 51(-0.6,3.4) 52(-1,3.4) 53(-1.4,3.4) 54(-1.8,3.4) 55(-2.2,3.4) 56(-2.6,3.4)
  rect 4x4 smd: 57(0,0)
  silkscreen extent -4.45,-3.67 3.67,3.68, body extent -3.53,-3.53 3.53,3.53, height 0.9
R0402-HD [mm] "Chip Resistor, 2-Leads, Body 1.00x0.50mm, IPC High Density"
  rect 0.4x0.45 smd: 1(-0.45,0) 2(0.45,0)
  body extent -0.55,-0.28 0.55,0.28, height 0.4
R0603-HD [mm] "Chip Resistor, 2-Leads, Body 1.60x0.80mm, IPC High Density"
  rect 0.75x0.8 smd: 1(-0.625,0) 2(0.625,0)
  body extent -0.85,-0.45 0.85,0.45, height 0.55
SMD_3P-L6.7-W0.9-R3-P2.65-ICSRC6508SFR [mm]
  rect 1.1x0.8 smd paste+0 mask+0.05: 1(-2.65,0) 3(2.65,0)
  rect 1x0.8 smd paste+0 mask+0.05: 2(0,0)
  silkscreen extent -2,-0.4 2,0.4
SMT_DIODE_SOD_323 [mm] "SOD-323(0805) Package"
  rect 0.63x0.83 smd: 1(-1.115,0) 2(1.115,0)
  silkscreen extent -0.9,-0.7 0.96,0.7, body extent -1.35,-0.62 1.35,0.62, height 1.1
SMT_DIODE_SOD_523 [mm] "SOD-523(0603) Package"
  rect 0.6x0.7 smd: 1(-0.71,0) 2(0.71,0)
  silkscreen extent -0.65,-0.4 0.65,0.4, body extent -0.8,-0.4 0.8,0.4, height 0.7
SMT_LED_0603 [mm] "SMT LED"
  rect 0.8x0.8 smd: 1(-0.8,0) 2(0.8,0)
  silkscreen extent -1.35,-0.56 1.35,0.56, body extent -0.81,-0.4 0.81,0.4, height 0.6
SMT_SW_PTS_820 [mm] "SMT Tactile ?Switch PTS 820 Series"
  rect 0.95x1.5 smd: 1(-2.075,0) 2(2.075,0)
  silkscreen extent -2,-1.5 2,1.5, body extent -2.25,-1.55 2.25,1.55, height 2.05
SMT_SW_TS_1186D_C_A [mm] "SMT Side tap switch XKB TS-1186D-C-A W4.7xD3.5xH1.65"
  rect 1.55x1 smd: 1(-2.625,0.85) 1(2.625,0.85) 2(-2.625,-0.85) 2(2.625,-0.85)
  round 0.65 hole 0.65 unplated: MH1(0,1.375) MH2(0,-1.375)
  silkscreen extent -2.35,-2.75 2.35,1.75, body extent -3.1,-2.75 3.1,1.8, height 1.65
SOT-236-HD [mm] "SOT23, 6-Leads, Body 2.90x2.80mm, Pitch 0.95mm, IPC High Density"
  rect 0.8x0.55 smd: 1(-1.25,0.95) 2(-1.25,0) 3(-1.25,-0.95) 4(1.25,-0.95) 5(1.25,0) 6(1.25,0.95)
  silkscreen extent -1.37,-1.5 0.45,1.9, body extent -1.45,-1.5 1.45,1.5, height 1.45
SOT-723-HD [mm] "SOTFL, 3-Leads, Body 1.20x1.20mm, Pitch 0.40mm, IPC High Density"
  rect 0.4x0.25 smd: 1(-0.55,0.4) 2(-0.55,-0.4) 3(0.55,0)
  silkscreen extent -0.67,-0.65 0.43,1.2, body extent -0.6,-0.62 0.6,0.62, height 0.5
THT_Male_P_1x10-2.54mm [mm] "THT Male pin header strip 1x10 2.54mm pitch"
  rect 1.5x1.5 hole 0.9: 1(0,0)
  round 1.5 hole 0.9: 2(0,-2.54) 3(0,-5.08) 4(0,-7.62) 5(0,-10.16) 6(0,-12.7) 7(0,-15.24) 8(0,-17.78) 9(0,-20.32) 10(0,-22.86)
  silkscreen extent -1.27,-24.13 1.27,1.27, body extent -1.46,-24.13 1.46,1.27, height 8.51
TSOP-20-HD [mm] "TSOP, 20-Leads, Body 6.50x4.40mm, Pitch 0.65mm, IPC High Density"
  oval 1.2x0.4 smd: 1(-2.85,2.925) 2(-2.85,2.275) 3(-2.85,1.625) 4(-2.85,0.975) 5(-2.85,0.325) 6(-2.85,-0.325) 7(-2.85,-0.975) 8(-2.85,-1.625) 9(-2.85,-2.275) 10(-2.85,-2.925) 11(2.85,-2.925) 12(2.85,-2.275) 13(2.85,-1.625) 14(2.85,-0.975) 15(2.85,-0.325) 16(2.85,0.325) 17(2.85,0.975) 18(2.85,1.625) 19(2.85,2.275) 20(2.85,2.925)
  silkscreen extent -2.97,-3.3 1.85,3.8, body extent -3.18,-3.3 3.17,3.3, height 1.2
USB_TYPEC_16P_HD [mm]
  round 0 hole 0.65 unplated: 0(-2.89,0) 0(2.89,0)
  rect 0.3x1.2 smd: A5(1.25,-1.436) A6(0.25,-1.436) A7(-0.25,-1.436) A8(1.75,-1.436) B5(-1.75,-1.436) B6(-0.75,-1.436) B7(0.75,-1.436) B8(-1.25,-1.436)
  rect 0.6x1.2 smd: GND(-3.2,-1.436) GND(3.2,-1.436) VBUS(-2.4,-1.436) VBUS(2.4,-1.436)
  oval 0.9x1.5 hole 0.5 slot 0.9 at 90 deg: SHELL(-4.32,3.68) SHELL(4.32,3.68)
  oval 0.9x1.7 hole 0.5 slot 1.2 at 90 deg: SHELL(-4.32,-0.5) SHELL(4.32,-0.5)
  silkscreen extent -4.47,-1.07 4.47,6.28, body extent -4.47,-1.51 4.48,6.24, height 3.26
X2SON4 [mm]
  oct 0.36x0.21 smd mask+0.051: 1(-0.42,0.325) 2(-0.42,-0.325) 3(0.42,-0.325) 4(0.42,0.325)
  rect 0.48x0.48 smd rot 45 mask+0: 5(0,0)
  silkscreen extent -0.81,-0.64 0.51,0.72, body extent -0.5,-0.5 0.5,0.5, height 0.34

## Part data
ANT1: library part Antenna_MIFA, "Meandered Inverted F Antenna"
C1 C2 C3 C4 C5 C6 C7 C8 C9 C10 C11 C12 C13 C14 C15 C16 C17 C18 C19 C20 C21 C22 C23 C24 C25 C26 C27 C28 C29 C30 C31 C32 C33 C34 C35 C37 C38 C39 C41 C42 C43 C44 C45 C46: library part SMT_C_0402, "Surface mount capacitor 0402"
D1: library part SMT_DIODE_SCHOTTKY_SOD_323, "Surface mount schottky diode SOD-323(0805) Package / C22626"
D2: library part SMT_LED_0603, "Surface mount LED 0603"
D4 D5 D6 D7: library part SMT_DIODE_TVS_U_SOD_523, "Surface mount unidirectional TVS diode SOD-523(0603) Package"
FB1: library part SMT_FB_0402, "C1857815"
FB2 FB3: library part SMT_FB_0603, "Surface mount ferrite beads 0603"
FET1: library part SI2301-P-Ch-MOSFET, "SI2301-P-Ch,-2.3A, -20V.RDS(ON) = 0.190Ω @ VGS = -2.5 V"
FET2: library part SI2302-N-Ch-MOSFET, "SI2302-N-Ch,3A, 20V.RDS(ON) = 0.082Ω @ VGS = 2.5 V"
J1: library part "Header 18", "Header, 18-Pin", LatestRevisionDate=17-Jul-2002, LatestRevisionNote="Re-released for DXP Platform.", Publisher="Altium Limited"
J2: library part USB_TYPEC_16P
J3: library part "Header 16", "Header, 16-Pin", LatestRevisionDate=17-Jul-2002, LatestRevisionNote="Re-released for DXP Platform.", Publisher="Altium Limited"
J5: "THT Male pin header strip 1x10"
L1 L2 L3: library part SMT_L_0805, "Surface mount inductor 0805"
L4: library part ACM2012
L5 L6 L7: library part SMT_L_0201, "Surface mount inductor 0201"
R1 R2 R3 R4 R5 R6 R7 R8 R9 R10 R11 R12 R13 R14 R15 R16 R17 R18 R19 R20 R21 R23 R24 R25 R27 R28 R29 R30 R31 R32 R33 R34 R35 R36: library part SMT_R_0402, "Surface mount resistor 0402"
R22: library part SMT_R_0603, "Surface mount resistor 0603"
S1 S2 S3 S4: "Generic SMT Tactile Switch"
U1: library part ESP32-S3
U2: library part AW32257
U3: library part SGM7220, "SGM7220XUQT12G/TR / TUSB320 / HUSB320_BA000-QN12R"
U4: library part AW99703
U6: library part AP7343, "300mA HIGH PSRR LOW NOISE LDO WITH ENABLE"
U7: "Low Capacitance(3pF) TVS Diode Array"

## Free pads (board coordinates)
  round 3.6 hole 2.1: 0(-11,4)
  oval 1.2x3.048 smd far side: 0(-8.259,3.961)
  round 0.025 smd far side: 0(-5.907,4.038)
  round 0 hole 1.2 unplated: 0(7.42,60.31)
  oval 0.4x3.5 smd: 36(-11.175,40.726) 36(-11.175,52.249) 36(-9.8,23.335) 36(-9.8,34.765) 36(3.425,40.751) 36(3.425,52.274) 36(9.8,23.335) 36(9.8,34.815)
  oval 0.4x15 on Mech6: 36(-11.175,46.5) 36(-9.8,29.075) 36(3.425,46.525) 36(9.8,29.075)
  oval 3.5x0.4 smd: 36(-9.624,53.825) 36(1.899,53.825)
  oval 5x0.4 smd: 36(-7.468,36.375) 36(7.518,36.375)
  oval 15x0.4 smd: 36(-3.875,39.2)
  oval 15x0.4 on Mech6: 36(-3.875,53.825)
  oval 20x0.4 smd: 36(0,21.775)
  oval 20x0.4 on Mech6: 36(0,36.375)

## Via types
v1: diameter 0.33, hole 0.152, Top/Sig1 to Bottom Layer, tented both sides, 1358 vias
v2: diameter 0.33/0/0/0.33 (per signal layer), hole 0.152, Top/Sig1 to Bottom Layer, tented both sides, 1 vias

## Nets (pads, with @x,y where several pads share a name; then routed paths per layer and width w, separated by ;. In a path a pad name is that pad's centre, name@x,y a point inside that pad or via, vN(x,y) a via of type N, cw(c..) or ccw(c..) an arc to the next point about the centre after c; other vN are vias at no path point)
BL_LED_SINK: J3.15 U4.B1 | length 18.4
  Top/Sig1 w0.254: J3.15@-3.25,11.712 v1(-3.25,12.275) ; U4.B1@0.6,27.9 0.6,27.919 v1(0.615,27.933)
  Layer 2 w0.254: v1(-3.25,12.275) -3.247,12.278 -3.247,13.35 -1.675,14.922 -1.675,21.371 -0.003,23.043 -0.003,26.303 -0.212,26.512 -0.212,27.759 -0.039,27.933 v1(0.615,27.933)
CAM_D2: J1.15 U1.18 | length 22
  Top/Sig1 w0.102: U1.18@-7.8,46.1 -7.781,46.119 -7.268,46.119 -7.187,46.2 v1(-7.125,46.2)
  Layer 2 w0.102: v1(-7.125,46.2) -7.101,46.2 -6.609,45.708 -6.363,45.708 -6.202,45.547 -1.502,45.547 0.114,43.931 3.681,43.931 4.949,45.199 4.949,47.608 5.385,48.044 8.23,48.044 v1(8.264,48.077)
  Bottom Layer w0.102: v1(8.264,48.077) 8.311,48.077 8.438,47.95 J1.15@10.05,47.95
CAM_D3: J1.17 U1.21 | length 21.7
  Top/Sig1 w0.102: U1.21@-7.8,44.9 -7.49,44.9 -7.103,45.286 v1(-7.103,45.301)
  Layer 2 w0.102: v1(-7.103,45.301) -6.531,45.301 -6.371,45.141 -2.4,45.141 -0.351,43.092 -0.101,43.092 0.413,42.578 0.854,42.578 1.8,43.524 3.849,43.524 5.355,45.031 5.355,46.305 5.95,46.9 8.15,46.9 v1(8.175,46.925)
  Bottom Layer w0.102: v1(8.175,46.925) 8.187,46.937 10.038,46.937 J1.17@10.05,46.95
CAM_D4: J1.18 U1.22 | length 21.4
  Top/Sig1 w0.102: U1.22@-7.8,44.5 -7.781,44.519 -7.343,44.519 -7.287,44.575 v1(-7.225,44.575)
  Layer 2 w0.102: v1(-7.225,44.575) -6.862,44.938 -2.484,44.938 -0.226,42.68 0.024,42.68 0.329,42.375 0.938,42.375 1.862,43.298 3.91,43.298 5.559,44.947 5.559,46.004 6.005,46.45 v1(8.275,46.45)
  Bottom Layer w0.102: v1(8.275,46.45) J1.18@10.05,46.45
CAM_D5: J1.16 U1.19 | length 21.7
  Top/Sig1 w0.102: U1.19@-7.8,45.7 -7.448,45.7 -7.398,45.75 -7.104,45.75 v1(-7.102,45.752)
  Layer 2 w0.102: v1(-7.102,45.752) -6.854,45.504 -6.447,45.504 -6.287,45.344 -2.316,45.344 -0.267,43.296 0.662,43.296 1.094,43.727 3.765,43.727 5.152,45.115 5.152,46.922 5.75,47.52 8.227,47.52 v1(8.249,47.542)
  Bottom Layer w0.102: v1(8.249,47.542) 8.292,47.498 10.001,47.498 J1.16@10.05,47.45
CAM_D6: J1.14 U1.17 | length 22.4
  Top/Sig1 w0.102: U1.17@-7.8,46.5 -7.783,46.517 -7.119,46.517 -7.033,46.604 v1(-6.971,46.604)
  Layer 2 w0.102: v1(-6.971,46.604) -6.118,45.75 -1.418,45.75 0.198,44.134 3.559,44.134 4.703,45.278 4.703,47.946 5.345,48.588 8.212,48.588 v1(8.243,48.618)
  Bottom Layer w0.102: v1(8.243,48.618) 8.417,48.443 J1.14@10.044,48.443
CAM_D7: J1.12 U1.15 | length 24.1
  Top/Sig1 w0.102: U1.15@-7.8,47.3 -7.631,47.3 -7.585,47.345 v1(-7.585,48.121)
  Layer 2 w0.102: v1(-7.585,48.121) -6.709,48.121 -5.436,46.848 -1.942,46.848 0.367,44.54 3.29,44.54 4.281,45.531 4.281,48.781 4.953,49.453 8.272,49.453 8.275,49.45 v1(9.325,49.45)
  Bottom Layer w0.102: v1(9.325,49.45) J1.12@10.05,49.45
CAM_D8: J1.11 U1.14 | length 23.7
  Top/Sig1 w0.102: v1(-7.1,48.8) -7.1,48.797 -7,48.697 U1.14@-7,48.1
  Layer 2 w0.102: v1(-7.1,48.8) -5.352,47.052 -1.857,47.052 0.451,44.743 3.193,44.743 3.998,45.548 3.998,48.898 5.07,49.969 v1@9.194,49.969
  Bottom Layer w0.102: v1(9.2,49.975) 9.213,49.962 10.038,49.962 J1.11@10.05,49.95
CAM_D9: J1.8 U1.11 | length 22.4
  Top/Sig1 w0.102: v1(-5.858,48.556) -5.8,48.499 U1.11@-5.8,48.1
  Layer 2 w0.102: v1(-5.858,48.556) -4.759,47.458 -1.689,47.458 0.619,45.15 2.768,45.15 3.448,45.83 3.448,49.125 5.155,50.832 7.607,50.832 8.063,51.288 8.851,51.288 9.038,51.475 v1(9.1,51.475)
  Bottom Layer w0.102: v1(9.1,51.475) 9.112,51.463 10.038,51.463 J1.8@10.05,51.45
CAM_HREF: J1.7 U1.12 | length 23.9
  Top/Sig1 w0.102: v1(-6.435,49.069) -6.435,48.66 -6.2,48.425 U1.12@-6.2,48.1
  Layer 2 w0.102: v1(-6.435,49.069) -6.427,49.077 -5.93,49.077 -5.533,48.68 -5.533,48.518 -4.675,47.661 -1.605,47.661 0.703,45.353 2.684,45.353 3.245,45.914 3.245,49.209 5.071,51.035 7.335,51.035 7.793,51.493 8.543,51.493 v1(9,51.95)
  Bottom Layer w0.102: v1(9,51.95) J1.7@10.05,51.95
CAM_MCLK: J1.9 R3.1 | length 24.2
  Layer 2 w0.102: v1(-7.65,49.55) -7.619,49.519 -7.319,49.519 -6.936,49.136 -6.936,49.121 -5.07,47.255 -1.773,47.255 0.535,44.947 2.997,44.947 3.7,45.65 3.7,49.021 5.26,50.581 7.881,50.581 8.351,51.051 9.188,51.051 9.263,50.975 v1(9.325,50.975)
  Bottom Layer w0.102: v1(9.325,50.975) 9.338,50.962 10.038,50.962 J1.9@10.05,50.95
CAM_PCLK: J1.13 R4.2 R5.1 U1.16 | length 27.6
  Top/Sig1 w0.102: v1(-9.875,47.8) -9.042,47.8 -8.893,47.651 -8.893,47.519 -8.276,46.902 -7.802,46.902 U1.16@-7.8,46.9
  Layer 2 w0.102: v1(-9.875,47.8) -9.831,47.756 -9.702,47.756 ; -9.701,47.755 -6.63,47.755 -5.52,46.645 -2.026,46.645 0.283,44.337 3.374,44.337 4.5,45.463 4.5,48.55 4.948,48.998 9.031,48.998 v1(9.056,48.973)
  Bottom Layer w0.102: v1(9.056,48.973) 9.068,48.962 10.038,48.962 J1.13@10.05,48.95
CAM_PWDN: J1.6 U1.10 | length 24
  Top/Sig1 w0.102: v1(-5.978,49.395) -5.934,49.351 -5.934,49.247 -5.397,48.71 -5.397,48.103 U1.10@-5.4,48.1
  Layer 2 w0.102: v1(-5.978,49.395) -5.96,49.395 -5.309,48.744 -5.309,48.582 -4.591,47.864 -1.521,47.864 0.788,45.556 2.6,45.556 3.042,45.998 3.042,49.294 4.987,51.239 7.164,51.239 7.719,51.794 8.269,51.794 v1(8.475,52)
  Bottom Layer w0.102: v1(8.475,52) 8.925,52.45 J1.6@10.05,52.45
CAM_RST: J1.4 U1.8 | length 22.5
  Top/Sig1 w0.102: v1(-4.915,49.135) -4.915,49.091 -4.6,48.777 U1.8@-4.6,48.1
  Layer 2 w0.102: v1(-4.915,49.135) -4.871,49.135 -4.007,48.271 -1.352,48.271 0.956,45.963 2.431,45.963 2.636,46.167 2.636,49.462 4.819,51.645 6.846,51.645 7.893,52.693 7.91,52.693 8.02,52.803 v1(8.082,52.803)
  Bottom Layer w0.102: v1(8.082,52.803) 8.729,53.45 J1.4@10.05,53.45
CAM_SCL: J1.3 R10.1 U1.7 | length 22.6
  Top/Sig1 w0.102: v1(-4.403,49.129) -4.403,49.085 -4.2,48.882 U1.7@-4.2,48.1 ; R10.1@1.925,48.25 v1(2.312,48.25)
  Layer 2 w0.102: v1(-4.403,49.129) -4.341,49.129 -3.687,48.474 -1.268,48.474 1.04,46.166 2.347,46.166 2.432,46.251 2.432,47.849 2.349,47.933 2.349,48.213 v1(2.312,48.25) 2.3,48.262 2.3,48.948 2.426,49.074 2.426,49.549 4.732,51.855 6.625,51.855 6.685,51.855 8.997,54.167 v1(9.325,54.167)
  Bottom Layer w0.102: v1(9.325,54.167) 9.542,53.95 J1.3@10.05,53.95
CAM_SDA: J1.1 R9.1 U1.6 | length 23.6
  Top/Sig1 w0.102: v1(-4.683,49.499) -4.325,49.499 -3.8,48.975 U1.6@-3.8,48.1 ; R9.1@1.952,49.064 v1(1.989,49.064)
  Layer 2 w0.102: v1(-4.683,49.499) -4.299,49.499 -3.477,48.677 -1.184,48.677 1.124,46.369 2.11,46.369 2.229,46.488 2.229,47.765 1.994,48 1.994,49.01 2.223,49.238 2.223,49.633 4.648,52.058 6.6,52.058 9.169,54.626 9.368,54.626 v1@9.391,54.65
  Bottom Layer w0.102: v1(9.389,54.652) 9.602,54.866 9.966,54.866 J1.1@10.05,54.95
CAM_VSYNC: J1.5 U1.9 | length 23.3
  Top/Sig1 w0.102: v1(-5.405,49.289) -5.361,49.245 -5.361,49.115 -5,48.754 U1.9@-5,48.1
  Layer 2 w0.102: v1(-5.405,49.289) -5.405,49.227 -5.232,49.054 -5.232,49.003 -4.469,48.24 -4.297,48.068 -1.437,48.068 0.872,45.759 2.516,45.759 2.839,46.083 2.839,49.378 4.903,51.442 7.011,51.442 7.862,52.292 7.88,52.292 7.963,52.375 v1(8.025,52.375)
  Bottom Layer w0.102: v1@8.025,52.367 8.077,52.419 8.219,52.419 8.751,52.95 J1.5@10.05,52.95
ESP_EN: C9.1 C17.2 J5.4 L6.2 R11.2 | length 44.3
  Top/Sig1 w0.102: v1(-8.525,51.375) R11.2@-7.875,51.375 -7.01,51.375 -6.848,51.213 -5.82,51.213 -5.636,51.029 -5.636,50.885 -5.527,50.776 -4.695,50.776 -4.719,50.8 L6.2@-4.84,50.8 ; v1(-3.297,39.997) -3.253,39.953 -3.138,39.953 -3.123,39.938 2.238,39.938 2.816,40.516 2.816,41.666 2.394,42.088 v1(2.394,42.118)
  Layer 2 w0.102: -8.878,47.27 -8.383,46.774 -8.383,41.533 -6.833,39.983 -3.311,39.983 v1(-3.297,39.997) ; -8.878,47.27 ccw(c-8.95,47.198) -8.951,47.299 -9.632,47.293 -9.927,47.293 -10.085,47.362 -10.382,47.66 -10.505,47.903 -10.505,48.334 -10.483,48.468 -10.382,49.468 -10.33,50.373 -10.302,50.898 -10.272,50.928 -9.825,51.375 v1(-8.525,51.375) ; v1(2.394,42.118) 2.394,42.11 2.293,42.01 2.164,41.828 2.121,41.766 2.121,41.754 2.074,41.706 1.936,41.402 1.936,40.998 1.936,40.788 2.617,40.108 5.114,40.108 9.183,36.038 10.392,36.038 10.936,35.495 J5.4@11.475,35.495
ESP_LNA: C4.2 R2.2 U1.1 | length 1.6
  Top/Sig1 w0.33: U1.1@-1.8,48.1 -1.8,49.19 C4.2@-1.79,49.2 -1.795,49.205 -1.795,49.67 R2.2@-1.8,49.675